# Altium PCB Sunfish_ECU_RevA.PcbDoc (part 1 of 2)
Units mil, origin at the board's own origin, x right, y up, seen from the top; angles counter-clockwise.
Board outline 3150 x 5900 mil, 4 copper layers (Top Layer, GND, Power, Bottom Layer); 197 components, 100 nets, 618 pads, 220 vias.
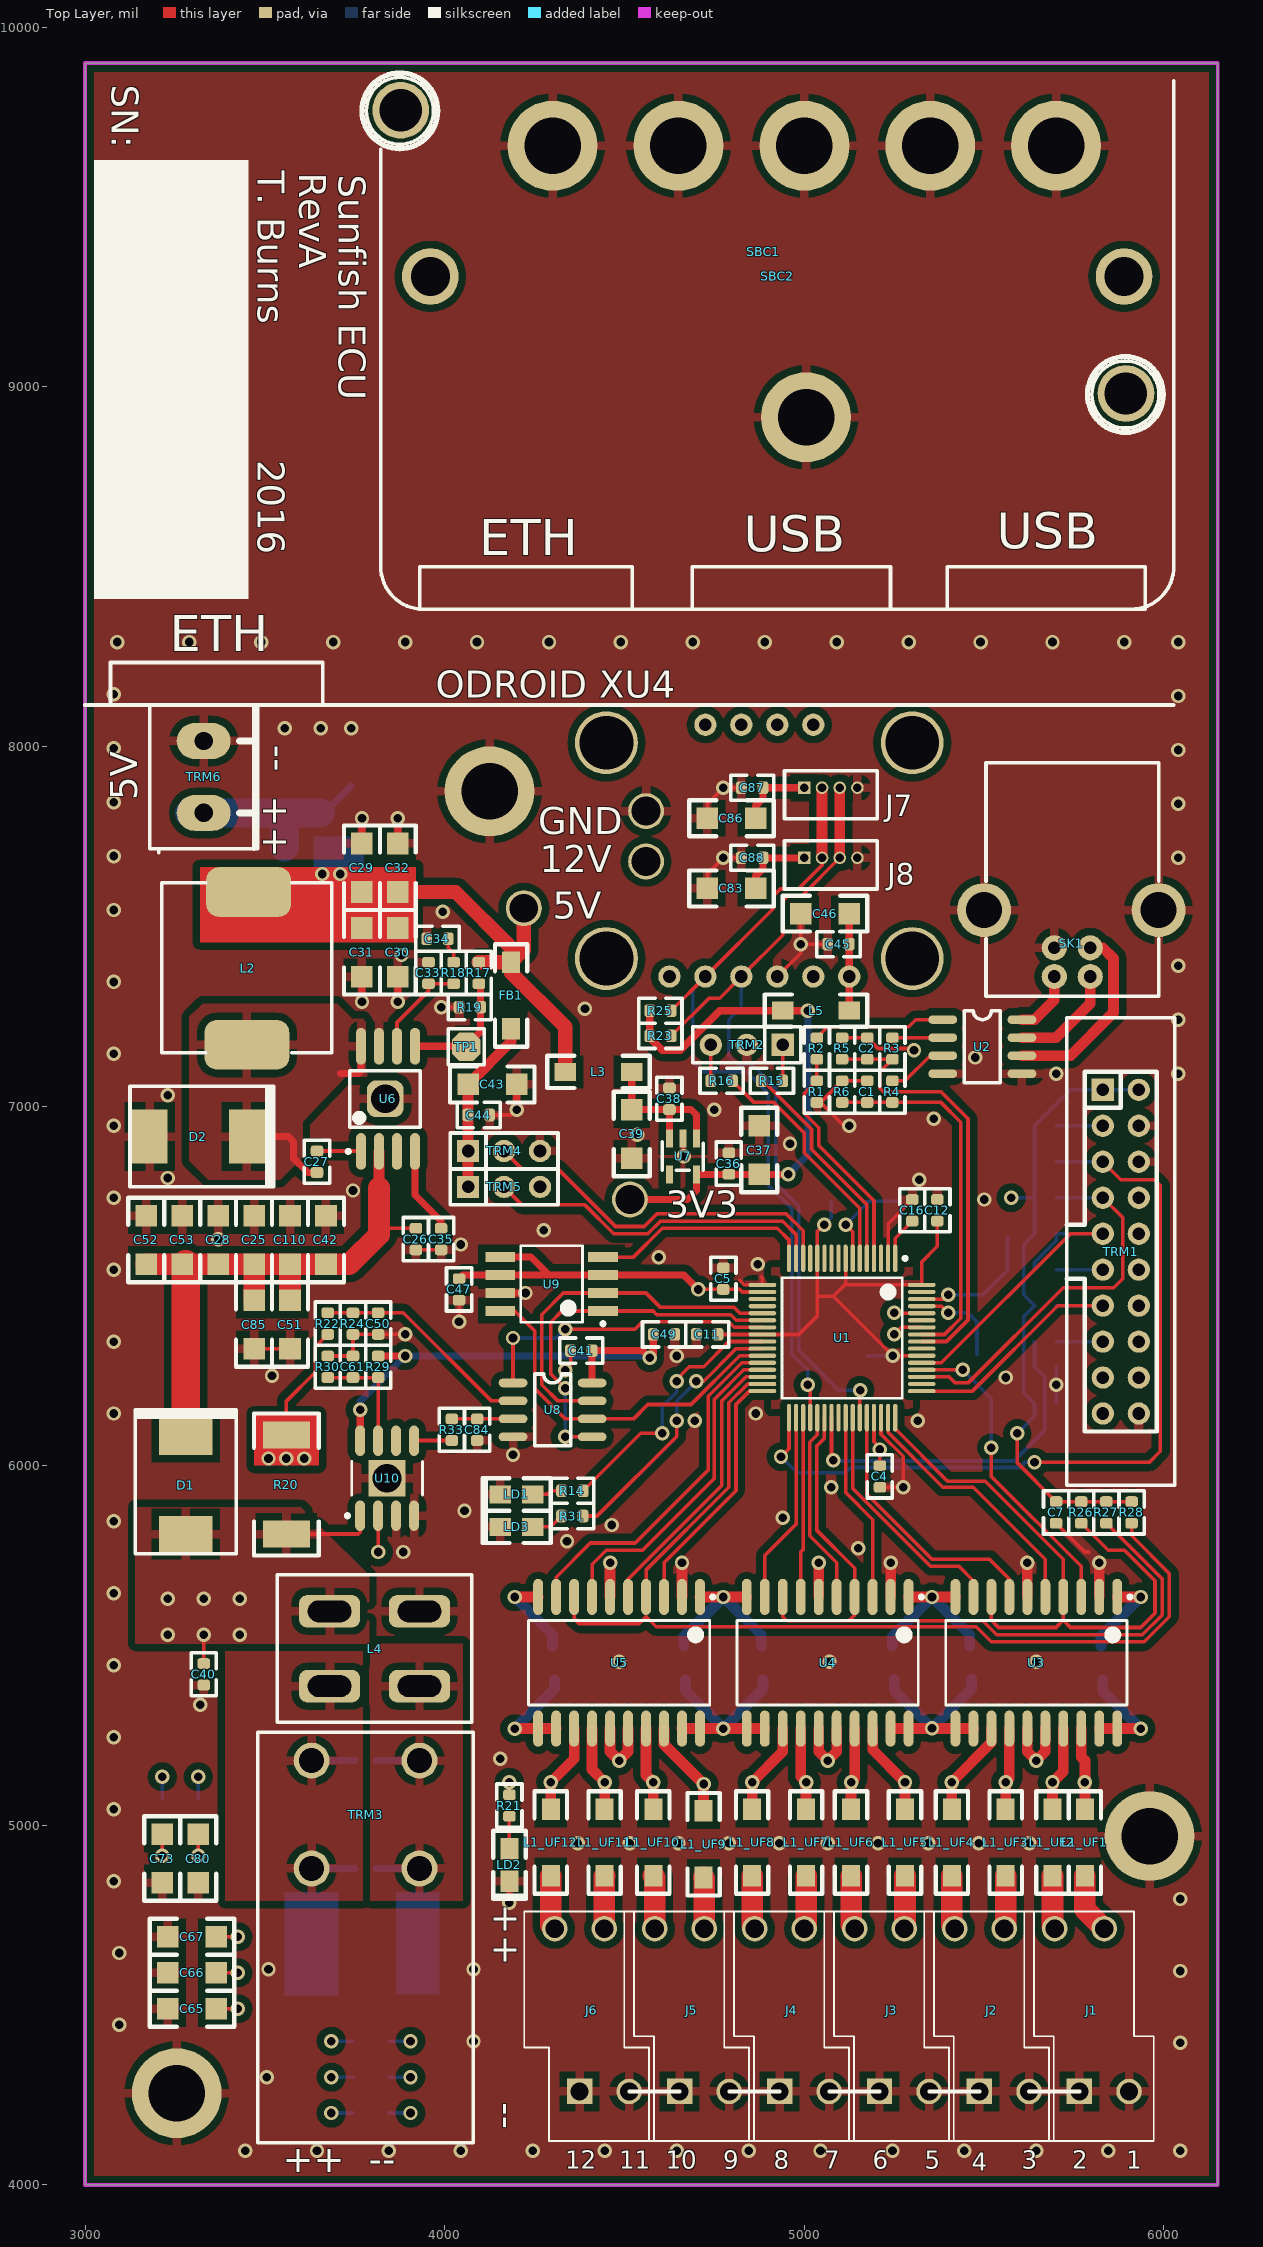
[diagram p0: Top Layer view]
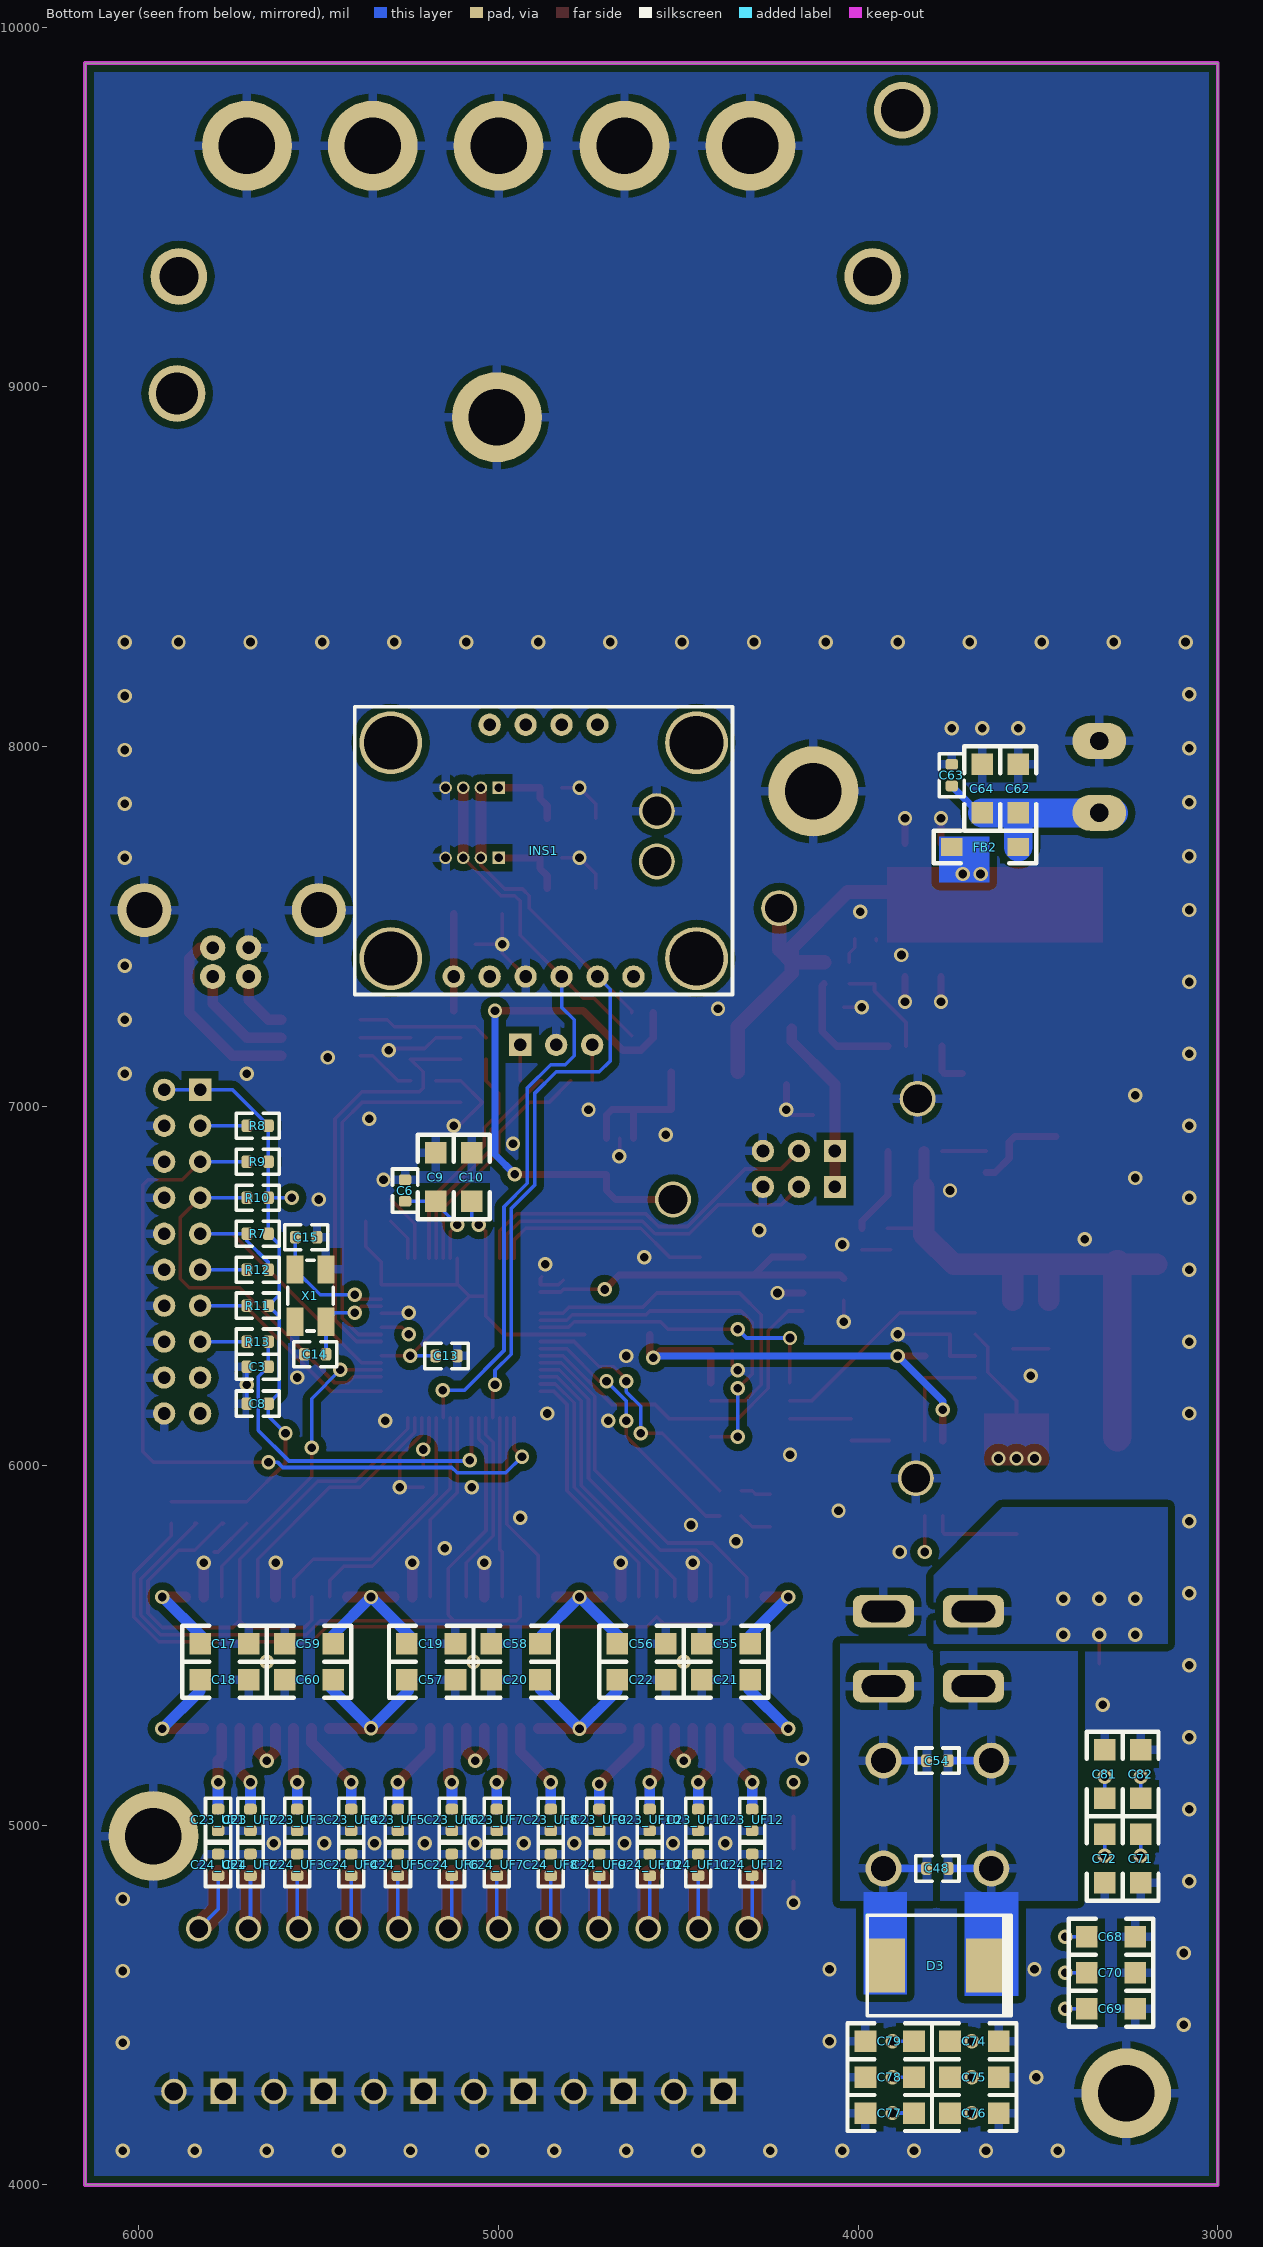
[diagram p1: Bottom Layer view, seen from below]
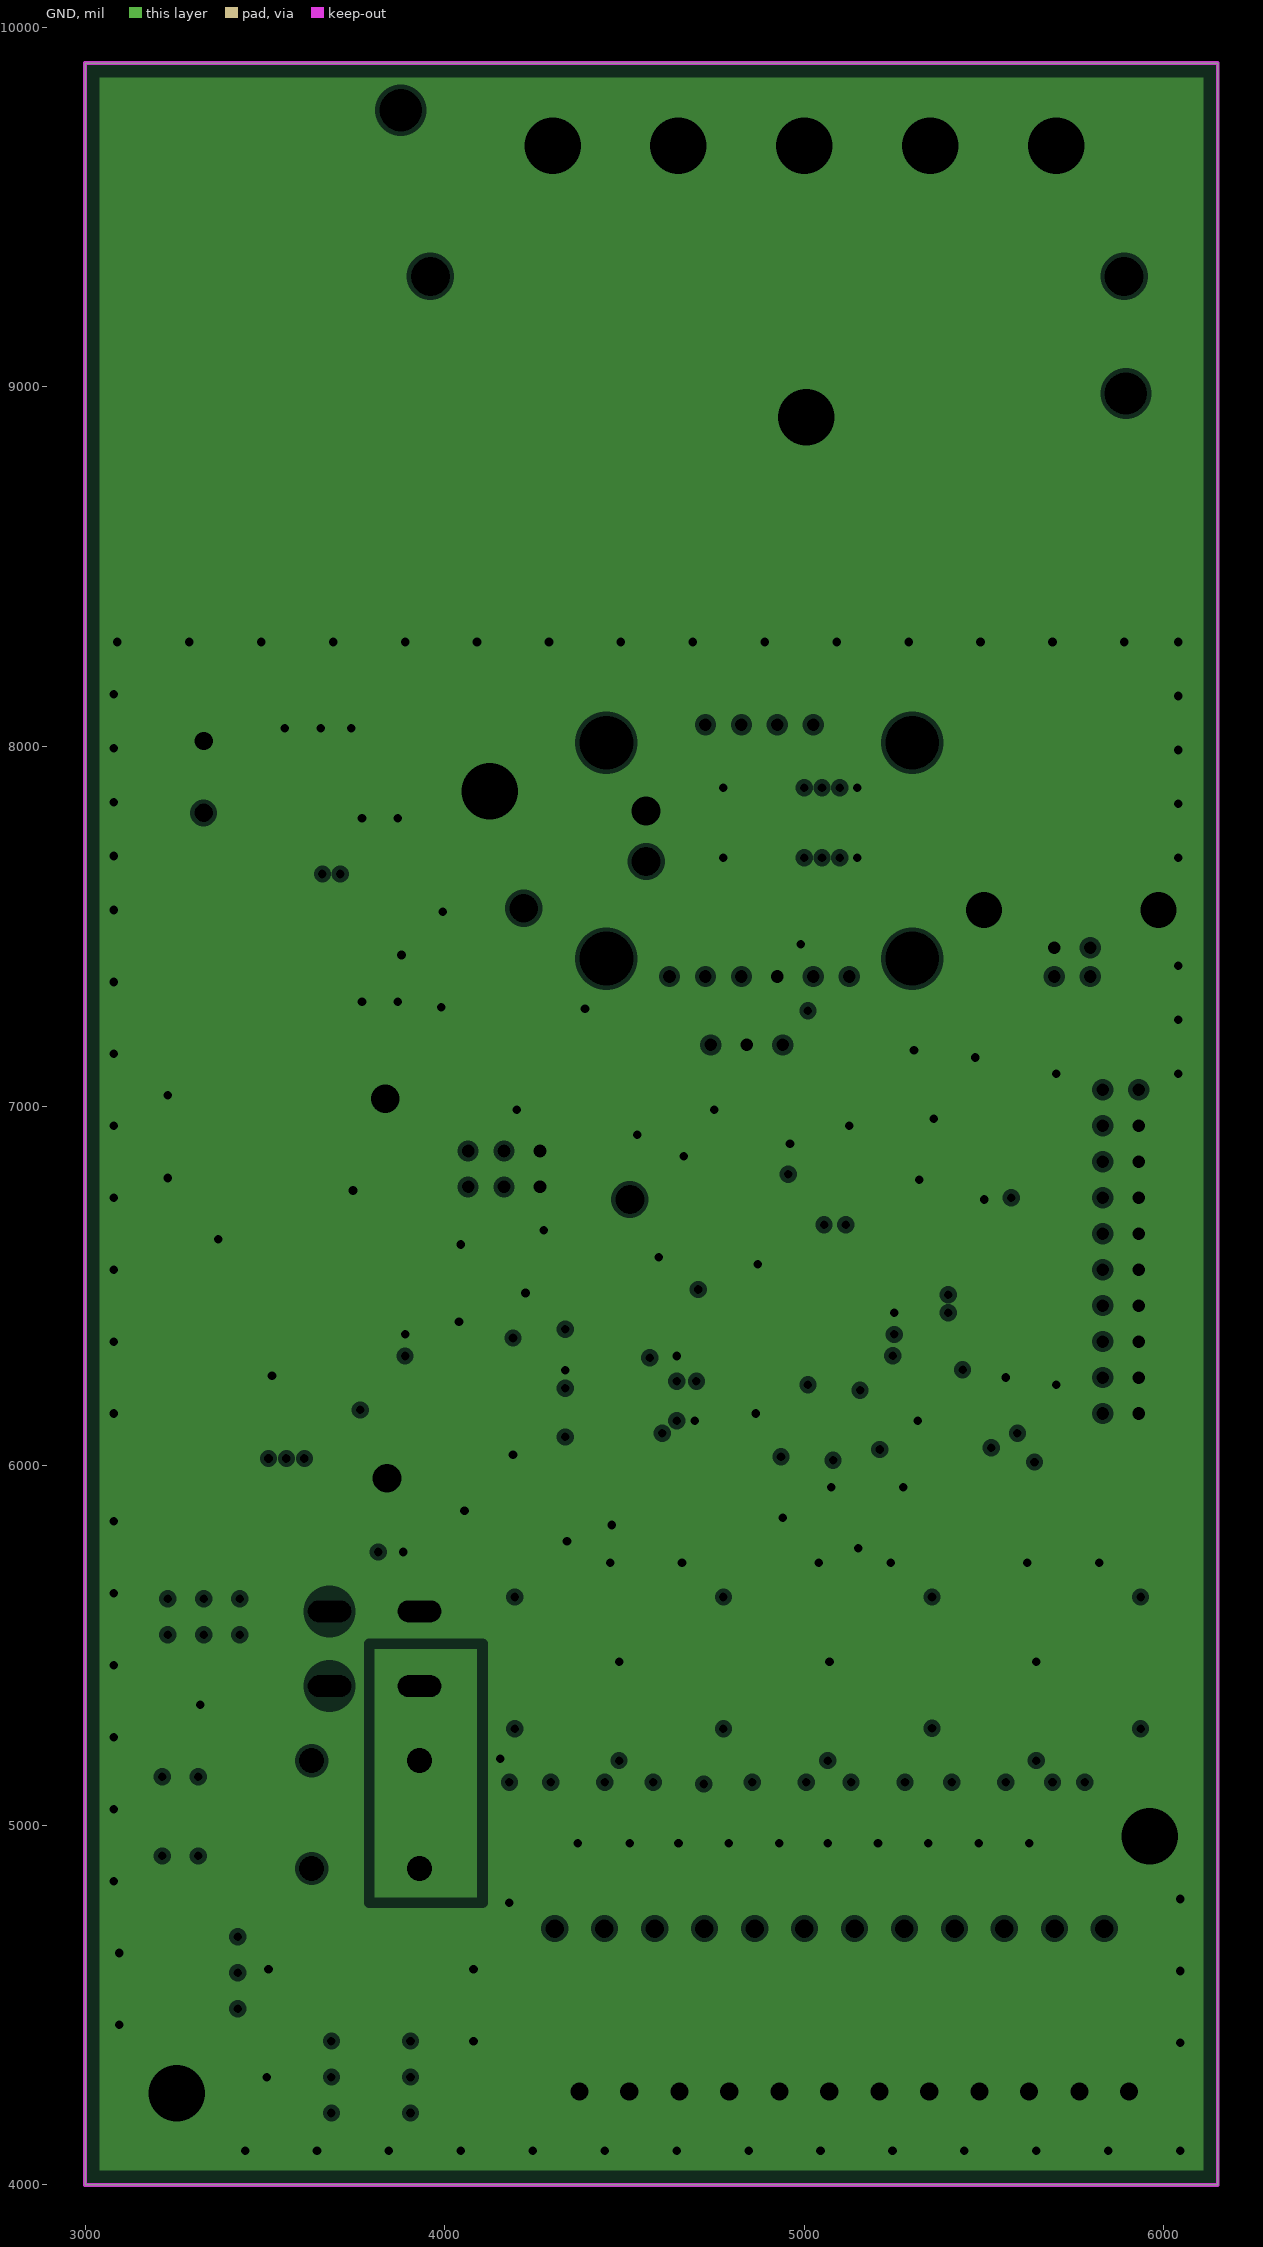
[diagram p2: GND, clearances drawn from the general rule]
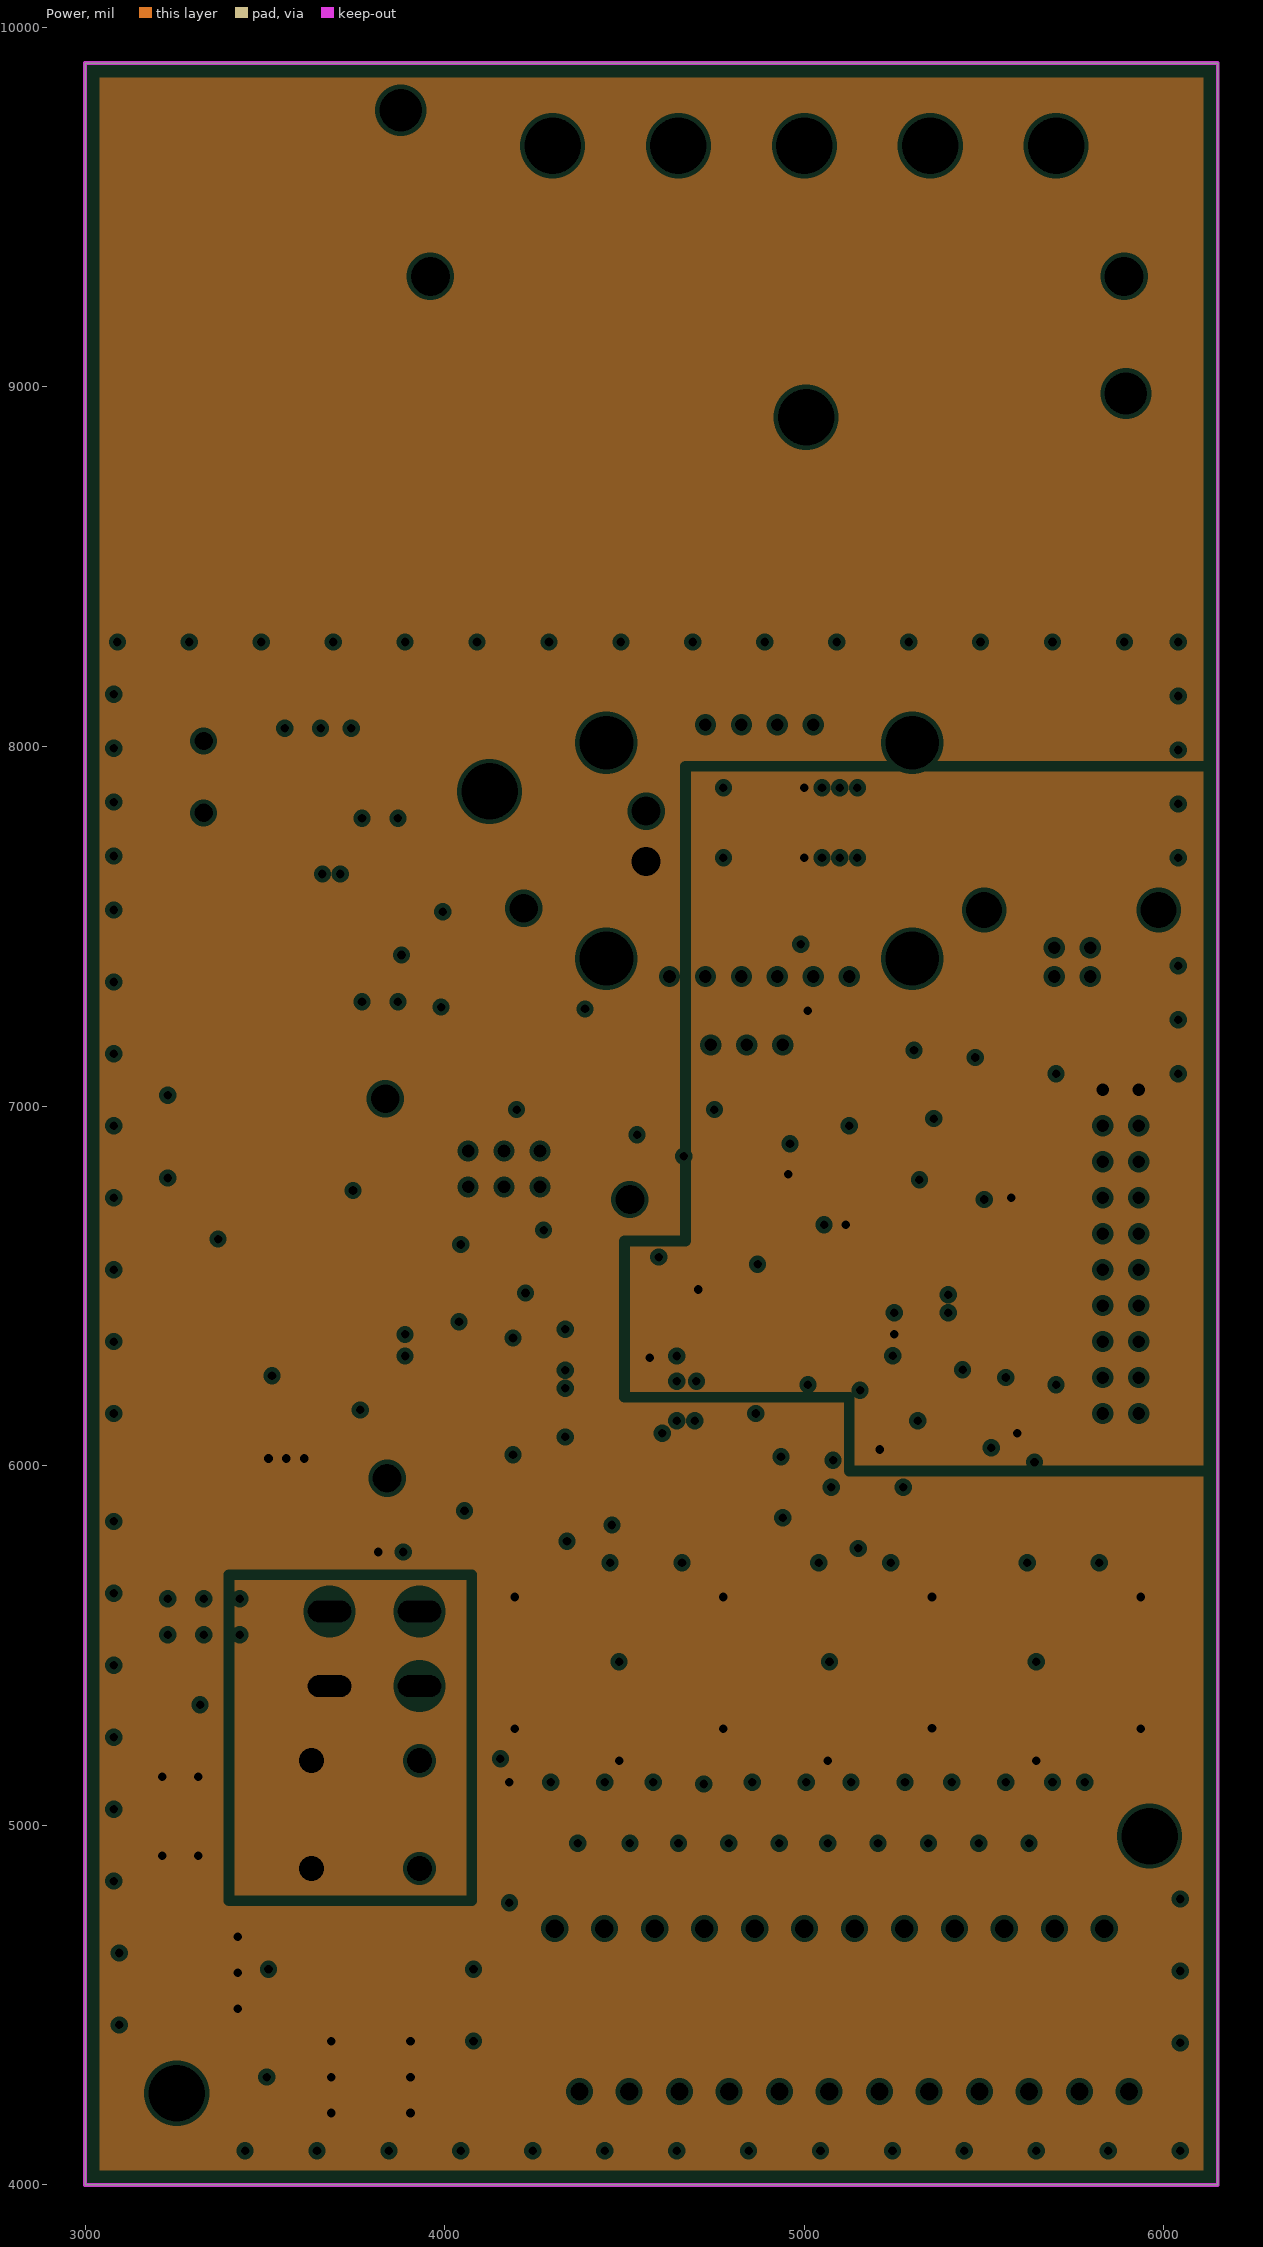
[diagram p3: Power, clearances drawn from the general rule]

## Layer stack, top to bottom
Top Layer: signal copper 1.4
Dielectric: core 12.6, FR-4, Dk 4.8
GND: plane copper 1.4, net (Multiple Nets)
Dielectric: prepreg 12.6, FR-4, Dk 4.8
Power: plane copper 1.4, net (Multiple Nets)
Dielectric: core 12.6, FR-4, Dk 4.8
Bottom Layer: signal copper 1.4

## Board outline
3000,4000 3000,9900 6150,9900 6150,4000

## Design rules (kind name [scope] priority, off if disabled: settings)
Clearance Clearance_poly [InPoly] p1: gap=20
Clearance [All] p2: gap=7
ComponentClearance [All] p1 off: gap=10 collisioncheckmode=3 verticalgap=10 showdistances=FALSE
HoleSize [All] p1: absolutevalues=TRUE maxlimit=300 minlimit=24 maxpercent=80.000 minpercent=20.000
MinimumAnnularRing [All] p1: minimumring=4
PlaneClearance [All] p1: clearance=12
PlaneConnect [All] p1: planeconnectstyle=Relief reliefexpansion=25 reliefentries=4 reliefconductorwidth=10 reliefairgap=10
PolygonConnect PolygonConnect_via [IsVia] p1: connectstyle=Direct reliefconductorwidth=10 reliefentries=4 polygonreliefangle="90 Angle"
PolygonConnect [All] p2: connectstyle=Relief reliefconductorwidth=25 reliefentries=4 polygonreliefangle="90 Angle"
RoutingVias [All] p1: holewidth=24 width=40 viastyle="Through Hole" minholewidth=24 minwidth=35 maxholewidth=28 maxwidth=50
SolderMaskExpansion [All] p1: expansion=4
TestPointUsage [All] p1: valid=0 allowmultiple=FALSE
Testpoint [(IsPad And (OnTopLayer Or OnBottomLayer))] p1: side=3 testpointundercomponent=TRUE minsize=40 maxsize=100 preferedsize=60 minholesize=0 maxholesize=40 preferedholesize=32 testpointgrid=1 style=297 order=0-112345678
Width [All] p1: maxlimit=300 minlimit=10 preferedwidth=10
15 further rules are at their usual default settings.

## Classes and differential pairs
net class CONTROL[1..12]: CONTROL1 CONTROL2 CONTROL3 CONTROL4 CONTROL5 CONTROL6 CONTROL7 CONTROL8 CONTROL9 CONTROL10 CONTROL11 CONTROL12
net class MOTOROUT[1..12]: MOTOROUT1 MOTOROUT2 MOTOROUT3 MOTOROUT4 MOTOROUT5 MOTOROUT6 MOTOROUT7 MOTOROUT8 MOTOROUT9 MOTOROUT10 MOTOROUT11 MOTOROUT12
channel class Sunfish_ECU_MotorFilter_RevA: UF1 UF2 UF3 UF4 UF5 UF6 UF7 UF8 UF9 UF10 UF11 UF12
net class OUT[1..12]: OUT1 OUT2 OUT3 OUT4 OUT5 OUT6 OUT7 OUT8 OUT9 OUT10 OUT11 OUT12
net class OUT_STATUS[1..3]: OUT_STATUS1 OUT_STATUS2 OUT_STATUS3

## Components (designator, comment, footprint, x,y, rotation, side; value= is the part's Value field where it differs from the comment)
C1 "22PF 100V" 0603 5175,7010 r90 top
C2 "22PF 100V" 0603 5175,7130 r90 top
C3 "100nF 50V" 0603 5640,6275 r0 bottom
C4 "100nF 50V" 0603 5210,6000 r270 top
C5 "100nF 50V" 0603 4775,6490 r90 top
C6 "100nF 50V" 0603 5260,6735 r90 bottom
C7 "100nF 50V" 0603 5700,5900 r270 top
C8 "100nF 50V" 0603 5640,6172.5 r0 bottom
C9 "10UF 50V" 1206 5175,6735 r90 bottom
C10 "10UF 50V" 1206 5075,6735 r90 bottom
C11 "100nF 50V" 0603 4760,6365 r180 top
C12 "100nF 50V" 0603 5370,6680 r90 top
C13 "100nF 50V" 0603 5175,6305 r180 bottom
C14 "22PF 100V" 0603 5480,6310 r0 bottom
C15 "22PF 100V" 0603 5565,6635 r180 bottom
C16 "100nF 50V" 0603 5300,6680 r90 top
C17 "10UF 50V" 1206 5830,5505 r180 bottom
C18 "10UF 50V" 1206 5830,5405 r180 bottom
C19 "10UF 50V" 1206 5255,5505 r180 bottom
C20 "10UF 50V" 1206 4885,5405 r0 bottom
C21 "10UF 50V" 1206 4300,5405 r0 bottom
C22 "10UF 50V" 1206 4670,5405 r180 bottom
C23_UF1 "10NF 50V" 0603 5780,5045 r270 bottom (schematic designator C23)
C23_UF2 "10NF 50V" 0603 5690,5045 r270 bottom (schematic designator C23)
C23_UF3 "10NF 50V" 0603 5560,5045 r270 bottom (schematic designator C23)
C23_UF4 "10NF 50V" 0603 5410,5045 r270 bottom (schematic designator C23)
C23_UF5 "10NF 50V" 0603 5280,5045 r270 bottom (schematic designator C23)
C23_UF6 "10NF 50V" 0603 5130,5045 r270 bottom (schematic designator C23)
C23_UF7 "10NF 50V" 0603 5005,5045 r270 bottom (schematic designator C23)
C23_UF8 "10NF 50V" 0603 4855,5045 r270 bottom (schematic designator C23)
C23_UF9 "10NF 50V" 0603 4720,5045 r270 bottom (schematic designator C23)
C23_UF10 "10NF 50V" 0603 4580,5045 r270 bottom (schematic designator C23)
C23_UF11 "10NF 50V" 0603 4445,5045 r270 bottom (schematic designator C23)
C23_UF12 "10NF 50V" 0603 4295,5045 r270 bottom (schematic designator C23)
C24_UF1 "10NF 50V" 0603 5780,4860 r90 bottom (schematic designator C24)
C24_UF2 "10NF 50V" 0603 5690,4860 r90 bottom (schematic designator C24)
C24_UF3 "10NF 50V" 0603 5560,4860 r90 bottom (schematic designator C24)
C24_UF4 "10NF 50V" 0603 5410,4860 r90 bottom (schematic designator C24)
C24_UF5 "10NF 50V" 0603 5280,4860 r90 bottom (schematic designator C24)
C24_UF6 "10NF 50V" 0603 5130,4860 r90 bottom (schematic designator C24)
C24_UF7 "10NF 50V" 0603 5005,4860 r90 bottom (schematic designator C24)
C24_UF8 "10NF 50V" 0603 4855,4860 r90 bottom (schematic designator C24)
C24_UF9 "10NF 50V" 0603 4720,4860 r90 bottom (schematic designator C24)
C24_UF10 "10NF 50V" 0603 4580,4860 r90 bottom (schematic designator C24)
C24_UF11 "10NF 50V" 0603 4445,4860 r90 bottom (schematic designator C24)
C24_UF12 "10NF 50V" 0603 4295,4860 r90 bottom (schematic designator C24)
C25 "10UF 50V" 1206 3470,6560 r90 top
C26 "100nF 50V" 0603 3920,6660 r270 top
C27 "100nF 50V" 0603 3645,6875 r270 top
C28 "10UF 50V" 1206 3370,6560 r90 top
C29 "10UF 50V" 1206 3770,7595 r90 top
C30 "10UF 50V" 1206 3870,7495 r270 top
C31 "10UF 50V" 1206 3770,7495 r270 top
C32 "10UF 50V" 1206 3870,7595 r90 top
C33 "22PF 100V" 0603 3955,7340 r90 top
C34 "1nF 50V" 0603 4010,7465 r180 top
C35 "10NF 50V" 0603 3990,6660 r270 top
C36 "100nF 50V" 0603 4790,6810 r90 top
C37 "10UF 50V" 1206 4875,6810 r90 top
C38 "100nF 50V" 0603 4625,6990 r90 top
C39 "10UF 50V" 1206 4520,6990 r270 top
C40 "100nF 50V" 0603 3330,5450 r270 top
C41 "100nF 50V" 0603 4410,6320 r180 top
C42 "10UF 50V" 1206 3670,6560 r90 top
C43 "10UF 50V" 1206 4065,7060 r0 top
C44 "100nF 50V" 0603 4065,6975 r0 top
C45 "100nF 50V" 0603 5125,7450 r180 top
C46 "10UF 50V" 1206 5125,7535 r180 top
C47 "100nF 50V" 0603 4040,6520 r270 top
C48 "100nF 50V" 0603 3750,4880 r0 bottom
C49 "100nF 50V" 0603 4580,6365 r0 top
C50 "100nF 50V" 0603 3815,6425 r270 top
C51 "10UF 50V" 1206 3570,6460 r270 top
C52 "10UF 50V" 1206 3170,6560 r90 top
C53 "10UF 50V" 1206 3270,6560 r90 top
C54 "100nF 50V" 0603 3750,5180 r0 bottom
C55 "10UF 50V" 1206 4300,5505 r0 bottom
C56 "10UF 50V" 1206 4670,5505 r180 bottom
C57 "10UF 50V" 1206 5255,5405 r180 bottom
C58 "10UF 50V" 1206 4885,5505 r0 bottom
C59 "10UF 50V" 1206 5460,5505 r0 bottom
C60 "10UF 50V" 1206 5460,5405 r0 bottom
C61 "100nF 50V" 0603 3745,6245 r90 top
C62 "10UF 50V" 1206 3555,7815 r90 bottom
C63 "100nF 50V" 0603 3740,7890 r90 bottom
C64 "10UF 50V" 1206 3655,7815 r90 bottom
C65 "10UF 50V" 1206 3365,4490 r180 top
C66 "10UF 50V" 1206 3365,4590 r180 top
C67 "10UF 50V" 1206 3365,4690 r180 top
C68 "10UF 50V" 1206 3365,4690 r180 bottom
C69 "10UF 50V" 1206 3365,4490 r180 bottom
C70 "10UF 50V" 1206 3365,4590 r180 bottom
C71 "10UF 50V" 1206 3215,4975 r270 bottom
C72 "10UF 50V" 1206 3315,4975 r270 bottom
C73 "10UF 50V" 1206 3215,4975 r270 top
C74 "10UF 50V" 1206 3745,4400 r180 bottom
C75 "10UF 50V" 1206 3745,4300 r180 bottom
C76 "10UF 50V" 1206 3745,4200 r180 bottom
C77 "10UF 50V" 1206 3845,4200 r0 bottom
C78 "10UF 50V" 1206 3845,4300 r0 bottom
C79 "10UF 50V" 1206 3845,4400 r0 bottom
C80 "10UF 50V" 1206 3315,4975 r270 top
C81 "10UF 50V" 1206 3315,5075 r90 bottom
C82 "10UF 50V" 1206 3215,5075 r90 bottom
C83 "10UF 50V" 1206 4865,7605 r180 top
C84 "100nF 50V" 0603 4090,6130 r270 top
C85 "10UF 50V" 1206 3470,6460 r270 top
C86 "10UF 50V" 1206 4865,7800 r180 top
C87 "100nF 50V" 0603 4885,7885 r180 top
C88 "100nF 50V" 0603 4885,7690 r180 top
C110 "10UF 50V" 1206 3570,6560 r90 top
D1 "DIODE_SSC54" DO-214AB 3280,5945 r270 top
D2 "DIODE_SSC54" DO-214AB 3315,6915 r180 top
D3 "TVS 15V" DO-214AB 3785,4610 r0 bottom
FB1 "Ferrite Bead, 6A" 1806 4185,7400 r270 top
FB2 "Ferrite Bead, 6A" 1806 3740,7720 r180 bottom
INS1 "Bosch INS" IC_INC_BNO055 5300,7410 r180 bottom locked
J1 "TRM_4_Double" 691230110004 5765,4260 r0 top locked
J2 "TRM_4_Double" 691230110004 5487,4260 r0 top locked
J3 "TRM_4_Double" 691230110004 5209,4260 r0 top locked
J4 "TRM_4_Double" 691230110004 4931,4260 r0 top locked
J5 "TRM_4_Double" 691230110004 4653,4260 r0 top locked
J6 "TRM_4_Double" 691230110004 4375,4260 r0 top locked
J7 "4 Positions Header, Shrouded Connector 0.049\" (1.25mm) Through Hole Tin" DF13-4P-1.25DSA 5000,7885 r0 top
J8 "4 Positions Header, Shrouded Connector 0.049\" (1.25mm) Through Hole Tin" DF13-4P-1.25DSA 5000,7690 r0 top
L1_UF1 "Ferrite Bead, 6A" 1806 5780,5045 r270 top (schematic designator L1)
L1_UF2 "Ferrite Bead, 6A" 1806 5690,5045 r270 top (schematic designator L1)
L1_UF3 "Ferrite Bead, 6A" 1806 5560,5045 r270 top (schematic designator L1)
L1_UF4 "Ferrite Bead, 6A" 1806 5410,5045 r270 top (schematic designator L1)
L1_UF5 "Ferrite Bead, 6A" 1806 5280,5045 r270 top (schematic designator L1)
L1_UF6 "Ferrite Bead, 6A" 1806 5130,5045 r270 top (schematic designator L1)
L1_UF7 "Ferrite Bead, 6A" 1806 5005,5045 r270 top (schematic designator L1)
L1_UF8 "Ferrite Bead, 6A" 1806 4855,5045 r270 top (schematic designator L1)
L1_UF9 "Ferrite Bead, 6A" 1806 4720,5040 r270 top (schematic designator L1)
L1_UF10 "Ferrite Bead, 6A" 1806 4580,5045 r270 top (schematic designator L1)
L1_UF11 "Ferrite Bead, 6A" 1806 4445,5045 r270 top (schematic designator L1)
L1_UF12 "Ferrite Bead, 6A" 1806 4295,5045 r270 top (schematic designator L1)
L2 "4.7uH 6A2" Wurth744771156 3450,7385 r0 top
L3 "Ferrite Bead, 6A" 1806 4335,7095 r0 top
L4 "CHOKE COM MODE ULTRA HC 100 OHMS" Choke_CM5441Z101B-10 3680,5595 r0 top
L5 "Ferrite Bead, 6A" 1806 4940,7265 r0 top
LD1 "Green LED 0805" 0805DIODE 4155,5920 r0 top
LD2 "Green LED 0805" 0805DIODE 4180,4845 r90 top
LD3 "Green LED 0805" 0805DIODE 4155,5830 r0 top
R1 "22K 1%" 0603 5035,7010 r90 top
R2 "15K 1%" 0603 5035,7190 r270 top
R3 "27R 1%" 0603 5245,7190 r270 top
R4 "27R 1%" 0603 5245,7070 r270 top
R5 "330K 1%" 0603 5105,7190 r270 top
R6 "330K 1%" 0603 5105,7070 r270 top
R7 "100K 1%" 0603 5700,6645 r180 bottom
R8 "100K 1%" 0603 5700,6945 r180 bottom
R9 "100K 1%" 0603 5700,6845 r180 bottom
R10 "100K 1%" 0603 5700,6745 r180 bottom
R11 "100K 1%" 0603 5700,6445 r180 bottom
R12 "0R 1%" 0603 5700,6545 r180 bottom
R13 "0R 1%" 0603 5700,6345 r180 bottom
R14 "1K96 1%" 0603 4385,5930 r180 top
R15 "10R 1%" 0603 4880,7070 r0 top
R16 "10R 1%" 0603 4800,7070 r180 top
R17 "10K2 1%" 0603 4095,7340 r90 top
R18 "45K3R 1%" 0603 4025,7400 r270 top
R19 "1K96 1%" 0603 4100,7275 r180 top
R20 "0R0015 1%" 2512 3560,5810 r90 top
R21 "2K2 1%" 0603 4180,5025 r90 top
R22 "10K2 1%" 0603 3675,6365 r90 top
R23 "2K2 1%" 0603 4630,7195 r180 top
R24 "2K2 1%" 0603 3745,6365 r90 top
R25 "2K2 1%" 0603 4630,7265 r180 top
R26 "10K2 1%" 0603 5770,5900 r270 top
R27 "10K2 1%" 0603 5840,5900 r270 top
R28 "10K2 1%" 0603 5910,5900 r270 top
R29 "100K 1%" 0603 3815,6245 r90 top
R30 "0R 1%" 0603 3675,6305 r270 top
R31 "1K96 1%" 0603 4385,5860 r180 top
R33 "10K2 1%" 0603 4020,6070 r90 top
SBC1 "Odroid XU4" ODROID_XU4 2760,8115 r90 top locked
SBC2 "SBC_ODROID_C1+" SBC_ODROID_C1+ 3960,11590 r270 top locked
SK1 "USB B Socket Horizontal" USB_B_Horizontal 5695,7360 r180 top
TP1 "Test Point" TP_SMT 4060,7165 r0 top
TRM1 "IDB20" IDC20_BOXED 5830,7045 r270 top
TRM2 "3 way pin strip" SIP_3 4940,7170 r180 top
TRM3 "2way screw terminal, High current" TERM_2POS_HORIZ_7.62MM 3630,4880 r0 top
TRM4 "3 way pin strip" SIP_3 4065,6875 r0 top
TRM5 "3 way pin strip" SIP_3 4065,6775 r0 top
TRM6 "Wurth 2way screw terminal" TERM_2POS_HORIZ_5.08MM 3330,7815 r90 top
U1 "IC_MICRO_ATSAM4S8BA-AU" TSQFP50P1200X1200X160-64M 5105,6355 r270 top locked
U2 "IC_USB_Transorb" SO-8 5385,7240 r0 top
U3 "High Side Switch" SOIC127P1030X265-20M 5870,5635 r270 top locked
U4 "High Side Switch" SOIC127P1030X265-20M 5290,5635 r270 top locked
U5 "High Side Switch" SOIC127P1030X265-20M 4710,5635 r270 top locked
U6 "TPS54531DDA" PSOP-8 3835,7020 r90 top
U7 "3V3 LDO" SOT-25-A 4625,6810 r0 top
U8 "12 Bit ADC" SO-8 4190,6230 r0 top
U9 "Dataflash 32MBit 85MHz" SOIC127P800X216-8M 4440,6430 r180 top
U10 "Current Sense Amp" SOIC127P600X168_HS-8M 3840,5965 r90 top
X1 "12MHz SMT Xtal" XTAL_5X3.2_SMD 5480,6400 r90 bottom

## Footprints (in the part's own frame and the unit in brackets; to place one, negate y for a bottom-side part, rotate by r counter-clockwise, add the part's x,y. Pads: shape width x height; smd on the part's side, far side on the other; paste and mask are expansions set on the pad)
0603 [mil]
  rrect50% 30x35 smd: 1(0,0) 2(60,0)
  silkscreen extent -30,-35 90,35
0805DIODE [mil]
  rect 60x50 smd: A(90,0) K(0,0)
  silkscreen extent -50,-45 140,45
1206 [mil]
  rect 60x60 smd: 1(0,0) 2(135,0)
  silkscreen extent -50,-50 185,50
1806 [mil]
  rect 60x50 smd: 1(0,0) 2(185,0)
  silkscreen extent -50,-45 235,45
2512 [mil]
  rect 75x130 smd: 1(0,0) 2(275,0)
  silkscreen extent -60,-90 335,90
691230110004 [mm] "3,50mm - modular - 2 rows - Right - horizontal entry with rising cage clamp - 04p"
  rect 1.8x1.8 hole 1.3: 1(0,0)
  round 1.8 hole 1.3: 2(3.5,0) 3(1.75,11.5) 4(-1.75,11.5)
  silkscreen extent -3.9,-3.5 5.25,12.7, body extent -3.9,-3.45 5.25,12.65, height 16.21
Choke_CM5441Z101B-10 [mil]
  rrect50% 170x90 hole 60 slot 121 at 0 deg: 1(0,-208) 2(250,-208) 3(250,0) 4(0,0)
  silkscreen extent -145,-308 395,102
DF13-4P-1.25DSA [mil]
  rect 35x35 hole 24: 1(0,0)
  round 35 hole 24: 2(49.21,0) 3(98.43,0) 4(147.64,0)
  silkscreen extent -55,-87 203,47
DO-214AB [mil]
  rect 100x150 smd: A(135,0) K(-135,0)
  silkscreen extent -210,-140 190,140
IC_INC_BNO055 [mil]
  round 175 hole 150: 0(0,0) 0(0,600) 0(850.39,0) 0(850.39,600)
  round 62 hole 35: 1(175,-50) 2(275,-50) 3(375,-50) 4(475,-50) 5(575,-50) 6(675,-50) 7(275,650) 8(375,650) 9(475,650) 10(575,650)
  silkscreen extent -100,-100 950,700
IDC20_BOXED [mil]
  rect 62x62 hole 35: 1(0,0)
  round 62 hole 35: 2(0,100) 3(100,0) 4(100,100) 5(200,0) 6(200,100) 7(300,0) 8(300,100) 9(400,0) 10(400,100) 11(500,0) 12(500,100) 13(600,0) 14(600,100) 15(700,0) 16(700,100) 17(800,0) 18(800,100) 19(900,0) 20(900,100)
  silkscreen extent -200,-100 1100,200
ODROID_XU4 [mm]
  round 4 hole 3: 0(22,-79.61) 0(42,-28.39)
  silkscreen extent 0,-83 3,-6.1
PSOP-8 [mm]
  oval 2.6x0.7 smd: 1(-3.711,1.717) 2(-3.711,0.447) 3(-3.711,-0.823) 4(-3.711,-2.093) 5(3.711,-2.093) 6(3.711,-0.823) 7(3.711,0.447) 8(3.711,1.717)
  rrect50% 2.6x2.6 smd: 9(0,0)
  silkscreen extent -3.84,-2.47 1.99,2.74
SBC_ODROID_C1+ [mm]
  round 4 hole 2.75: 0(58,49) 0(58,0)
  silkscreen extent 44.2,-3.5 81.5,52.51
SIP_3 [mil]
  rect 62x62 hole 35: 1(0,0)
  round 62 hole 35: 2(100,0) 3(200,0)
  silkscreen extent -50,-50 250,50
SO-8 [mil]
  oval 80x24 smd: 1(0,0) 2(0,-50) 3(0,-100) 4(0,-150) 5(220,-150) 6(220,-100) 7(220,-50) 8(220,0)
  silkscreen extent 60,-175 160,25
SOIC127P600X168_HS-8M [mm] "SOIC, 8-Leads, Body 5.0x4.0mm (max), Pitch 1.27mm, IPC Low Density"
  oval 2.15x0.7 smd: 1(-2.65,1.905) 2(-2.65,0.635) 3(-2.65,-0.635) 4(-2.65,-1.905) 5(2.65,-1.905) 6(2.65,-0.635) 7(2.65,0.635) 8(2.65,1.905)
  rect 2.55x2.6 smd: 9(0,0)
  silkscreen extent -2.77,-2.5 1.18,2.93, body extent -1.99,-2.49 1.99,2.49, height 1.68
SOIC127P800X216-8M [mm]
  rect 2.1x0.7 smd: 1(0,0) 2(0,-1.27) 3(0,-2.54) 4(0,-3.81) 5(7.25,-3.81) 6(7.25,-2.54) 7(7.25,-1.27) 8(7.25,0)
  silkscreen extent -0.13,-4.6 5.8,1.02, body extent 1.03,-4.6 6.21,0.79, height 2.16
SOIC127P1030X265-20M [mm] "SOIC, 20-Leads, Body 12.8x7.6mm (max), Pitch 1.27mm, IPC Low Density"
  oval 2.55x0.7 smd: 1(0,0) 2(0,-1.27) 3(0,-2.54) 4(0,-3.81) 5(0,-5.08) 6(0,-6.35) 7(0,-7.62) 8(0,-8.89) 9(0,-10.16) 10(0,-11.43) 11(9.3,-11.43) 12(9.3,-10.16) 13(9.3,-8.89) 14(9.3,-7.62) 15(9.3,-6.35) 16(9.3,-5.08) 17(9.3,-3.81) 18(9.3,-2.54) 19(9.3,-1.27) 20(9.3,0)
  silkscreen extent -0.12,-12.11 7.63,1.03, body extent 0.85,-12.11 8.45,0.68, height 2.65
SOT-25-A [mil]
  rect 20x50 smd: 1(75,100) 2(37.99,100) 3(0,100) 4(0,0) 5(75,0)
  silkscreen extent -20,12 94,91
TERM_2POS_HORIZ_5.08MM [mil]
  oval 100x150 hole 51: 1(0,0) 2(200,0)
  silkscreen extent -110,-150 300,150
TERM_2POS_HORIZ_7.62MM [mm]
  round 2.54 hole 1.75: 1(0,0) 1(0,7.62) 2(7.62,0) 2(7.62,7.62)
  silkscreen extent -3.81,-19.38 11.43,9.62
TP_SMT [mm]
  oct 2x2 smd: 1(0,0)
  silkscreen extent -1.27,-1.27 1.27,1.27
TSQFP50P1200X1200X160-64M [mm] "TSQFP, 64-Leads, Body 12.0x12.0mm (max), Pitch 0.50mm, IPC Low Density"
  oval 1.95x0.3 smd: 1(-5.625,3.75) 2(-5.625,3.25) 3(-5.625,2.75) 4(-5.625,2.25) 5(-5.625,1.75) 6(-5.625,1.25) 7(-5.625,0.75) 8(-5.625,0.25) 9(-5.625,-0.25) 10(-5.625,-0.75) 11(-5.625,-1.25) 12(-5.625,-1.75) 13(-5.625,-2.25) 14(-5.625,-2.75) 15(-5.625,-3.25) 16(-5.625,-3.75) 33(5.625,-3.75) 34(5.625,-3.25) 35(5.625,-2.75) 36(5.625,-2.25) 37(5.625,-1.75) 38(5.625,-1.25) 39(5.625,-0.75) 40(5.625,-0.25) 41(5.625,0.25) 42(5.625,0.75) 43(5.625,1.25) 44(5.625,1.75) 45(5.625,2.25) 46(5.625,2.75) 47(5.625,3.25) 48(5.625,3.75)
  oval 0.3x1.95 smd: 17(-3.75,-5.625) 18(-3.25,-5.625) 19(-2.75,-5.625) 20(-2.25,-5.625) 21(-1.75,-5.625) 22(-1.25,-5.625) 23(-0.75,-5.625) 24(-0.25,-5.625) 25(0.25,-5.625) 26(0.75,-5.625) 27(1.25,-5.625) 28(1.75,-5.625) 29(2.25,-5.625) 30(2.75,-5.625) 31(3.25,-5.625) 32(3.75,-5.625) 49(3.75,5.625) 50(3.25,5.625) 51(2.75,5.625) 52(2.25,5.625) 53(1.75,5.625) 54(1.25,5.625) 55(0.75,5.625) 56(0.25,5.625) 57(-0.25,5.625) 58(-0.75,5.625) 59(-1.25,5.625) 60(-1.75,5.625) 61(-2.25,5.625) 62(-2.75,5.625) 63(-3.25,5.625) 64(-3.75,5.625)
  silkscreen extent -5.75,-4.25 4.25,4.58, body extent -5,-5 5,5, height 1.6
USB_B_Horizontal [mil]
  round 70 hole 35: 1(0,0) 2(-100,0) 3(-100,-80) 4(0,-80)
  round 150 hole 100: 5(-290,-185) 6(195,-185)
  silkscreen extent -290,-595 190,55
Wurth744771156 [mm]
  rrect50% 6x3.5 smd: 1(0,-5.461) 2(0.127,5.334)
  silkscreen extent -6.01,-6.01 5.99,5.99
XTAL_5X3.2_SMD [mm]
  rect 2x1.2 smd: 1(0,0) 2(3.7,0) 3(3.7,2.2) 4(0,2.2)
  silkscreen extent -0.65,-0.5 4.35,2.7

## Part data
C1 C2 C14 C15 C33: library part CAP_22PF_100V_5%_0603, "CAP CER 22PF 100V 5% NP0 0603"
C3 C4 C5 C6 C7 C8 C11 C12 C13 C16 C26 C27 C36 C38 C40 C41 C44 C45 C47 C48 C49 C50 C54 C61 C63 C84 C87 C88: library part CAP_100NF_50V_10%_0603, "CAP CER 100nF 50V 10% X7R 0603"
C9 C10 C17 C18 C19 C20 C21 C22 C25 C28 C29 C30 C31 C32 C37 C39 C42 C43 C46 C51 C52 C53 C55 C56 C57 C58 C59 C60 C62 C64 C65 C66 C67 C68 C69 C70 C71 C72 C73 C74 C75 C76 C77 C78 C79 C80 C81 C82 C83 C85 C86 C110: library part CAP_10UF_50V_10%_1206, "CAP CER 10UF 50V 10% X5R 1206"
C23_UF1 C23_UF2 C23_UF3 C23_UF4 C23_UF5 C23_UF6 C23_UF7 C23_UF8 C23_UF9 C23_UF10 C23_UF11 C23_UF12 C24_UF1 C24_UF2 C24_UF3 C24_UF4 C24_UF5 C24_UF6 C24_UF7 C24_UF8 C24_UF9 C24_UF10 C24_UF11 C24_UF12 C35: library part CAP_10NF_50V_10%_0603, "CAP CER 10NF 50V 10% X7R 0603"
C34: library part CAP_1NF_50V_10%_0603, "CAP CER 1nF 50V 10% X7R 0603"
D1 D2: "Schottky Diode, 5A, 40V SSC54, DO214AB"
D3: library part DIODE_TVS_SMCJ15A, "TVS Diode, 15V"
FB1 FB2 L1_UF1 L1_UF2 L1_UF3 L1_UF4 L1_UF5 L1_UF6 L1_UF7 L1_UF8 L1_UF9 L1_UF10 L1_UF11 L1_UF12 L3 L5: library part "IND_FERRITE_ BLM41PG600SN1L"
INS1: library part IC_INS_BNO055
J1 J2 J3 J4 J5 J6: "WR-TBL Terminal Blocks Serie 2301 - 3.50 mm with Rising Clamp"
J7 J8: library part CON_4_Pos_Header, "CON_4_Pos_Header"
L2: library part IND_4.7uH_6A2, "FIXED IND 4.7UH 6.2A 34 MOHM"
L4: library part CHOKE_COM_MODE_100MHz
LD1 LD2 LD3: library part LED_Green_0805, "WL-SMCW SMD CHIP LED WATERCLEAR"
R1: library part RES_22K_1%_0603, "Resistor, 22K, 1%, 0603"
R2: library part RES_15K_1%_0603, "Resistor, 15K, 1%, 0603"
R3 R4: library part RES_27R_1%_0603, "Resistor, 27R, 1%, 0603"
R5 R6: library part RES_330K_1%_0603, "Resistor, 330K, 1%, 0603"
R7 R8 R9 R10 R11 R29: library part RES_100K_1%_0603, "Resistor, 100K, 1%, 0603"
R12 R13: library part RES_0R_1%_0603, "Resistor, 0R, 1%, 0603"
R14 R19 R31: library part RES_1K96_1%_0603, "Resistor, 1K96, 1%, 0603"
R15 R16: library part RES_10R_1%_0603, "Resistor, 10R, 1%, 0603"
R17 R22 R26 R27 R28 R33: library part RES_10K2_1%_0603, "Resistor, 10K2, 1%, 0603"
R18: library part RES_45K3_1%_0603, "Resistor, 45K3, 1%, 0603"
R20: library part RES_0R0015_1%_2512, "Resistor, 0R0015, 1%, 2512"
R21 R23 R24 R25: library part RES_2K2_1%_0603, "Resistor, 2K2, 1%, 0603"
R30: library part RES_0R_1%_0603_1, "Resistor, 0R, 1%, 0603"
SBC1: library part SBC_ODROID_XU4
SK1: library part USB_B_Horizontal
TP1: library part MISC_TP_SMT, "Probe compatible test point"
TRM1: library part TRM_IDC20, "IDC BOX HEADER .100\" 20POS"
TRM2 TRM4 TRM5: library part TRM_3WaySocket, "3 Way pin strip"
TRM3: library part TRM_2way_ScrewTerminal_7.62mm, "TERM BLOCK 2POS HORIZ 7.62MM T/H"
TRM6: library part TRM_2way_ScrewTerminal, "TERM BLOCK 2POS HORIZ 5.08MM T/H"
U1: "64 Pin, 512KB Flash, 128K SRAM"
U2: "TVS DIODE 5.25VWM 8SOIC"
U3 U4 U5: library part IC_HSS_BTS724G, "IC HISIDE PWR SWITCH 4CH PDSO-20"
U6: library part IC_SMPS_TPS54531, "SMPS"
U7: library part IC_XC6210B332MR-G, "IC REG LDO 3.3V 0.7A SOT25"
U8: library part IC_ADC_MCP3202, "MCP3202, 12 Bit, 2 CH ADC"
U9: library part IC_Dataflash_32MBit, "IC DATAFLASH 32MB 85MHZ 8SOIC"
U10: library part IC_OPAMP_MAX9920+, "IC OPAMP CURR SENSE 230KHZ 8SOIC"
X1: library part XTAL_12MHZ_SMT, "Crystal 12.0000MHz 30ppm 12pF 40 Ohm -20°C - 70°C Surface Mount 4-SMD, No Lead (DFN, LCC)"

## Free pads (board coordinates)
  round 250 hole 157: 0(3255,4255) 0(4125,7875) 0(4300,9670) 0(4650,9670) 0(5000,9670) 0(5005,8915) 0(5350,9670) 0(5700,9670) 0(5960,4970)
  round 100 hole 80: 0(3840,5965) 0(4220,7550) 1(3835,7020) 3(4515,6740) 4(4560,7680) 5(4560,7820)

## Via types
v1: diameter 40, hole 24, Top Layer to Bottom Layer, tented both sides, 220 vias

## Nets (pads, with @x,y where several pads share a name; then routed paths per layer and width w, separated by ;. In a path a pad name is that pad's centre, name@x,y a point inside that pad or via, vN(x,y) a via of type N, cw(c..) or ccw(c..) an arc to the next point about the centre after c; other vN are vias at no path point)
5V_SW: C27.2 D2.K L2.1 U6.8 | length 391.8
  Top Layer w20: D2.K@3450,6915 3565,6915 3580,6900 3580,6855 3620,6815 C27.2@3645,6815 ; 3710,7090 3759.7,7090 3767.41,7097.72 U6.8@3767.41,7166.1
12V_CURRENT: R33.1 U10.5 | length 106.6
  Top Layer w10: U10.5@3915,6069.33 3914.33,6070 R33.1@4020,6070
ADC_12V: C84.1 R33.2 U8.3 | length 170
  Top Layer w10: R33.2@4020,6130 C84.1@4090,6130 U8.3@4190,6130
ADC_VSUP: C50.1 R22.2 R24.2 U8.2 | length 616.5
  Top Layer w10: R22.2@3675,6425 R24.2@3745,6425 C50.1@3815,6425 3885,6425 4130,6180 U8.2@4190,6180
AMP_REF: C61.1 R29.1 R30.2 U10.7 | length 315.7
  Top Layer w10: R30.2@3675,6245 C61.1@3745,6245 R29.1@3815,6245 U10.7@3815,6069.33
CONTROL1: U1.52 U3.3 | length 885.2
  Top Layer w10: U1.52@5326.46,6266.42 v1(5440,6266.42) v1@5443.58,6266.42 ; v1(5520,6050) 5520,5970 5770,5720 U3.3@5770,5635
  Bottom Layer w10: v1(5440,6266.42) 5520,6186.42 v1(5520,6050)
CONTROL2: U1.47 U3.5 | length 729.4
  Top Layer w10: U1.47@5232.95,6133.54 5232.95,6092.05 5385,5940 5470,5940 5670,5740 U3.5@5670,5635
CONTROL3: U1.44 U3.7 | length 756.3
  Top Layer w10: U1.44@5173.9,6133.54 5173.9,5921.1 5355,5740 5515,5740 5570,5685 U3.7@5570,5635
CONTROL4: U1.42 U3.9 | length 683.8
  Top Layer w10: U1.42@5134.53,6133.54 5134.53,5936.43 5350.96,5720 5430,5720 5470,5680 U3.9@5470,5635
CONTROL5: U1.41 U4.3 | length 529.7
  Top Layer w10: U1.41@5114.84,6133.54 5114.84,5925.16 5190,5850 U4.3@5190,5635
CONTROL6: U1.37 U4.5 | length 538.4
  Top Layer w10: U1.37@5036.1,6133.54 5036.1,6086.1 5015,6065 5015,5805 5090,5730 U4.5@5090,5635
CONTROL7: U1.35 U4.7 | length 501.3
  Top Layer w10: U4.7@4990,5635 4990,5760 4996.73,5766.73 U1.35@4996.73,6133.54
CONTROL8: U1.34 U4.9 | length 534.6
  Top Layer w10: U4.9@4890,5635 4890,5750 4977.05,5837.05 U1.34@4977.05,6133.54
CONTROL9: U1.32 U5.3 | length 706.9
  Top Layer w10: U5.3@4610,5635 4610,5730 4810,5930 4810,6170 4847.36,6207.36 U1.32@4883.54,6207.36
CONTROL10: U1.30 U5.5 | length 793.9
  Top Layer w10: U5.5@4510,5635 4510,5685 4770,5945 4770,6180 4836.73,6246.73 U1.30@4883.54,6246.73
CONTROL11: U1.29 U5.7 | length 917
  Top Layer w10: U5.7@4410,5635 4410,5725.62 4449.38,5765 4550,5765 4750,5965 4750,6185 4831.42,6266.42 U1.29@4883.54,6266.42
CONTROL12: U1.28 U5.9 | length 995.5
  Top Layer w10: U5.9@4310,5635 4310,5690 4405,5785 4530,5785 4733,5988 4733,6193 4826.1,6286.1 U1.28@4883.54,6286.1
CS_ADC: U1.23 U8.1 | length 843.6
  Top Layer w10: U8.1@4190,6230 v1(4190,6355) ; v1(4335,6379.02) 4529.02,6379.02 4550,6400 4790,6400 4805.47,6384.53 U1.23@4883.54,6384.53
  Bottom Layer w10: v1(4190,6355) 4310.98,6355 v1(4335,6379.02)
CS_DATAFLASH: U1.16 U9.4 | length 615.1
  Top Layer w10: U9.4@4440,6580 4525,6580 4605,6660 4925,6660 4957.36,6627.64 U1.16@4957.36,6576.46
D+: SK1.3 U2.6 | length 532.1
  Top Layer w30: U2.6@5605,7140 5740,7140 5860,7260 5860,7410 5830,7440 SK1.3@5795,7440
D-: SK1.2 U2.7 | length 304.4
  Top Layer w30: U2.7@5605,7190 5700,7190 5795,7285 SK1.2@5795,7360
DDM: C2.1 R3.2 R5.2 U1.56 | length 1248
  Top Layer w10: R5.2@5105,7130 C2.1@5175,7130 R3.2@5245,7130 5210,7095 5210,7050 5220,7040 5380,7040 5455,6965 5455,6745 ; U1.56@5326.46,6345.16 5395.16,6345.16 5455,6405 5455,6745 ; 5455,6765 5455,6745
DDP: C1.1 R4.2 R6.2 U1.57 | length 1025
  Top Layer w10: R6.2@5105,7010 C1.1@5175,7010 R4.2@5245,7010 5380,7010 5435,6955 5435,6410 5389.84,6364.84 U1.57@5326.46,6364.84